# Altium PCB PCB.PcbDoc
Units mm, origin at the board's own origin, x right, y up, seen from the top; angles counter-clockwise.
Board outline 38.99 x 14.86 mm, 2 copper layers (Top Layer, Bottom Layer); 9 components, 8 nets, 21 pads, 0 vias.
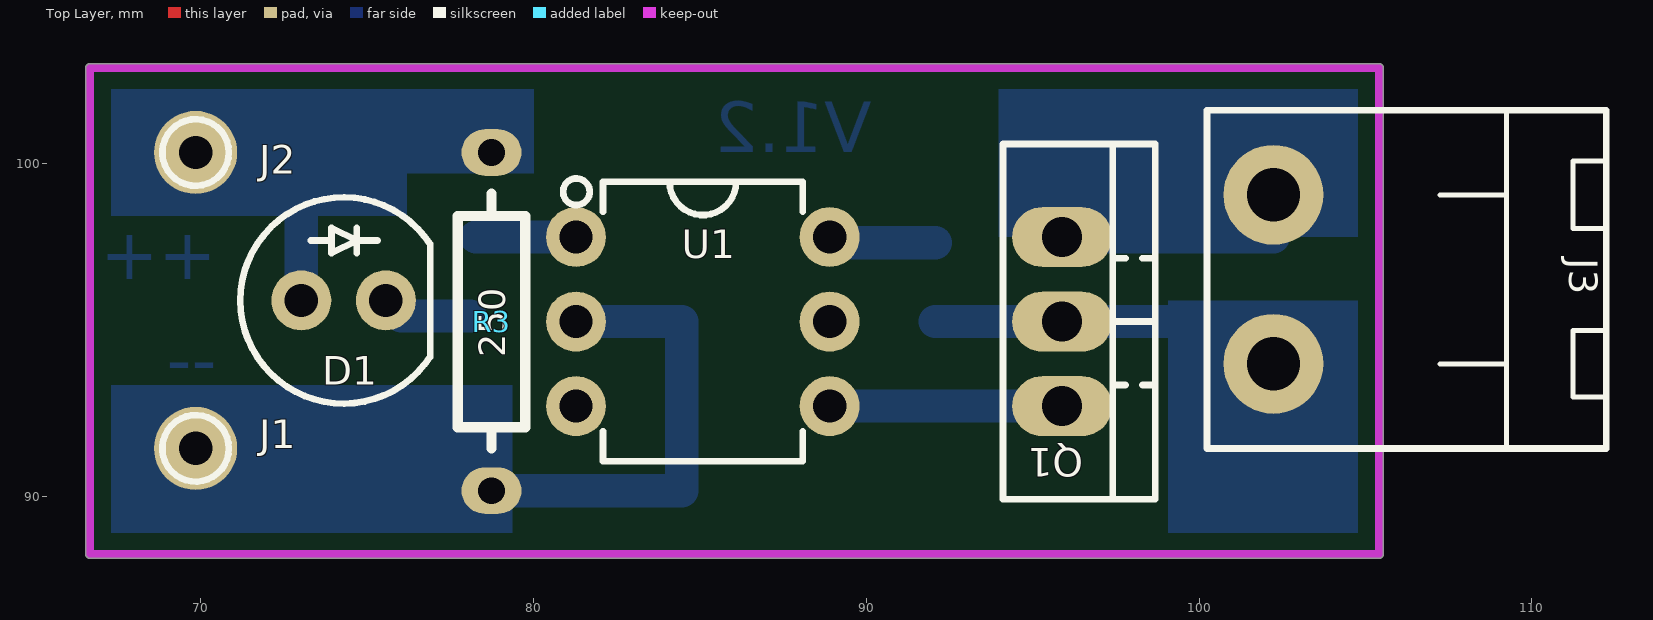
[diagram p0: Top Layer view]
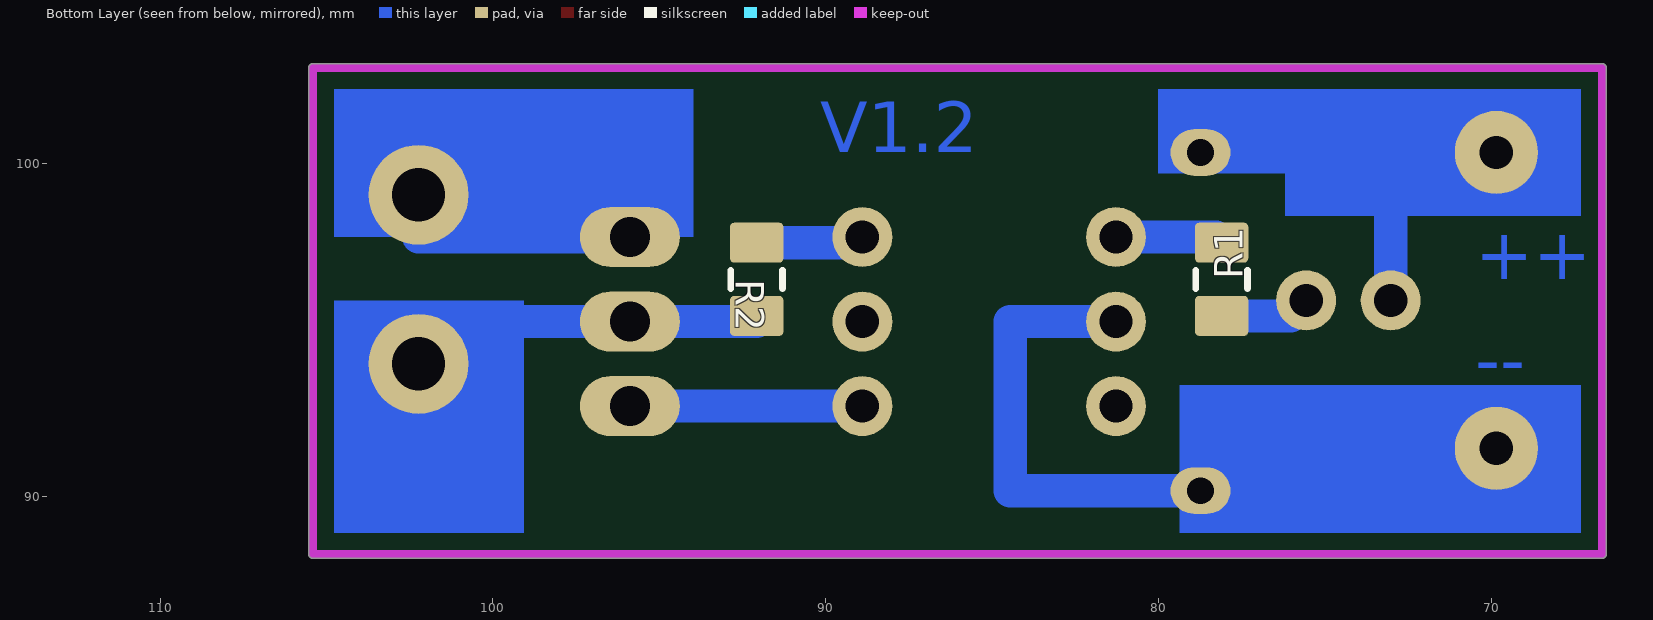
[diagram p1: Bottom Layer view, seen from below]
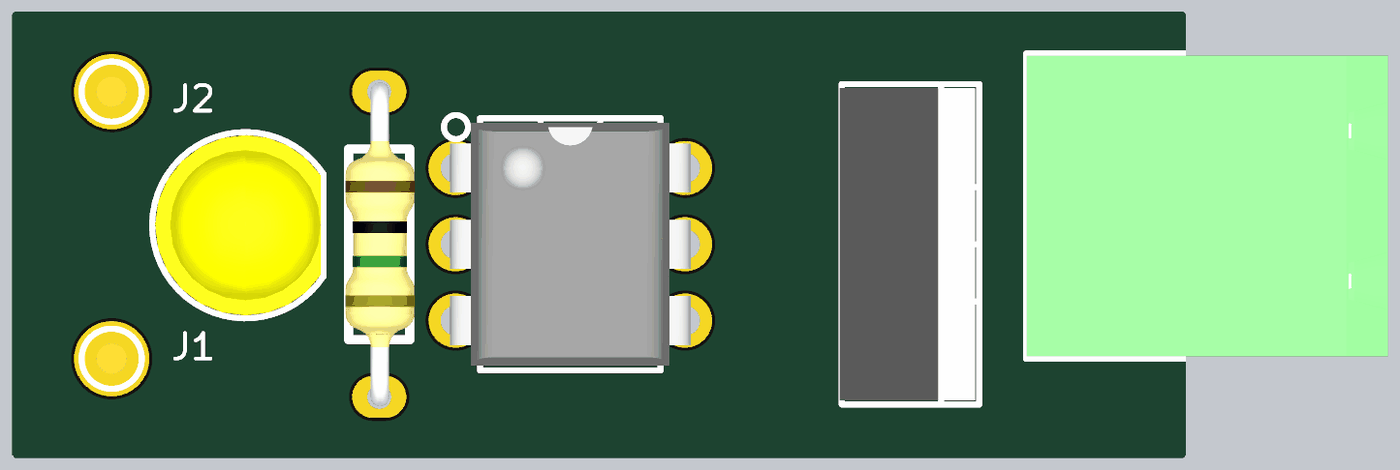
[diagram p2: 3D render of the assembled board from above, using the file's embedded part models]

## Layer stack, top to bottom
Top Solder: solder mask 0.0102, Solder Resist, Dk 3.5
Top Layer: signal copper 0.0356
Dielectric 1: dielectric 0.32, FR-4, Dk 4.8
Bottom Layer: signal copper 0.0356
Bottom Solder: solder mask 0.0102, Solder Resist, Dk 3.5

## Board outline
66.675,88.138 cw(c66.675,88.265) 66.548,88.265 66.548,102.87 cw(c66.675,102.87) 66.675,102.997 105.41,102.997 cw(c105.41,102.87) 105.537,102.87 105.537,88.265 cw(c105.41,88.265) 105.41,88.138

## Design rules (kind name [scope] priority, off if disabled: settings)
Clearance [All] p1: gap=0.254
Height [All] p1: minheight=0 maxheight=30 prefheight=12.7
PolygonConnect [All] p1: connectstyle=Relief reliefconductorwidth=0.254 reliefentries=4 polygonreliefangle="90 Angle" airgapwidth=0.254
RoutingCorners [All] p1: cornerstyle=90-Degree minsetback=2.54 maxsetback=2.54
RoutingVias [All] p1: holewidth=0.711 width=1.27 viastyle="Through Hole" minholewidth=0.711 minwidth=1.27 maxholewidth=1 maxwidth=1.27
SolderMaskExpansion [All] p1: expansion=0.102
Width [All] p1: maxlimit=0.3 minlimit=0.3 preferedwidth=0.3
28 further rules are at their usual default settings.

## Components (designator, comment, footprint, x,y, rotation, side; value= is the part's Value field where it differs from the comment)
D1 "YELLOW" LED_THD_5MM_YELLOW 74.295,95.885 r0 top
J1 "1PIN" TestPoint_THD_A 69.85,91.44 r90 top
J2 "1PIN" TestPoint_THD_A 69.85,100.33 r0 top
J3 "2PIN" Connector_Phoenix_2PIN_MSTB 102.235,96.52 r270 top (schematic designator J2)
Q1 "BT139" TO220_3PIN_V 95.885,95.25 r270 top
R1 "330" R_SMD_0805_EXPANDED 78.105,96.52 r90 bottom
R2 "330" R_SMD_0805_EXPANDED 92.075,96.52 r270 bottom
R3 "250" R_THD_AXIAL0.4(1/4W) 78.74,95.25 r270 top
U1 "MOC3021" DIP_6 85.09,95.25 r0 top

## Footprints (in the part's own frame and the unit in brackets; to place one, negate y for a bottom-side part, rotate by r counter-clockwise, add the part's x,y. Pads: shape width x height; smd on the part's side, far side on the other; paste and mask are expansions set on the pad)
Connector_Phoenix_2PIN_MSTB [mm] "Phoenix Contact, MSTB 5.08mm Pitch, 2 Way, Right Angle PCB Header"
  round 3 hole 1.6: 1(-2.54,0) 2(2.54,0)
  silkscreen extent -5.08,-2 5.08,10, body extent -5,-1.99 5,10.01, height 8.6
DIP_6 [mm] "DIP, pitch 2.54mm, 300mil Width"
  round 1.8 hole 1: 1(-3.81,2.54) 2(-3.81,0) 3(-3.81,-2.54) 4(3.81,-2.54) 5(3.81,0) 6(3.81,2.54)
  silkscreen extent -4.2,-4.2 3,4.3, body extent -4,-4.04 4,4.04, height 4.31
LED_THD_5MM_YELLOW [mm] "LED, THD, 5MM, YELLOW"
  round 1.8 hole 1: 1(-1.27,0) 2(1.27,0)
  silkscreen extent -3.1,-3.1 2.6,3.1, body extent -2.99,-3 2.5,3, height 9.14
R_SMD_0805_EXPANDED [mm] "Resistor, SMD, 0805-2012(2.0X1.3mm,1/8W)"
  rrect20% 1.2x1.6 smd mask+0.1: 1(-1.1,0) 2(1.1,0)
  Top Layer pour cut-out: -0.5,0.8 0.5,0.8 0.5,-0.8 -0.5,-0.8
  silkscreen extent -0.28,-0.77 0.28,0.77, body extent -1.15,-0.67 1.15,0.67, height 0.76
R_THD_AXIAL0.4(1/4W) [mm] "Resistor, Thru-Hole, AXIAL0.4(1/4Watt),"
  oval 1.4x1.8 hole 0.8: 1(-5.08,0) 2(5.08,0)
  silkscreen extent -3.84,-1.02 3.81,1.02, body extent -5.38,-1.13 5.38,1.18, height 3.51
TestPoint_THD_A [mm] "TEST POINT, SMALLEST SIZE"
  round 2.5 hole 1: 1(0,0)
  silkscreen extent -1,-1 1,1, body extent -0.5,-0.5 0.5,0.5, height 6.5
TO220_3PIN_V [mm] "TO-220 3 LEAD, TO-262, pitch: 2.54mm  10x4.5mm"
  oval 1.8x3 hole 1.2: 1(-2.54,0) 2(0,0) 3(2.54,0)
  silkscreen extent -5.33,-1.78 5.33,2.79, body extent -5.2,-1.85 5.2,2.65, height 19

## Part data
D1: library part LED_YELLOW, "LED, Yellow"
J1 J2: library part Connector_Socket_1Pin_Female, "Connector, Socket, 1Pin"
J3: library part Connector_Header_2Pin, "Connector, Header, 2Pin"
Q1: library part Triac, "Triac,"
R1 R2 R3: library part Resistor, "Resistor"
U1: "Opto-Triac"

## Nets (pads, with @x,y where several pads share a name; then routed paths per layer and width w, separated by ;. In a path a pad name is that pad's centre, name@x,y a point inside that pad or via, vN(x,y) a via of type N, cw(c..) or ccw(c..) an arc to the next point about the centre after c; other vN are vias at no path point)
GND: J1.1 R3.2 U1.2 | length 24.1
  Bottom Layer w1: J1.1 69.85,90.17 84.455,90.17 84.455,95.25 U1.2
NetD1_1: D1.1 J2.1 R3.1 | length 7
  Bottom Layer w1: J2.1@70.485,100.33 73.025,100.33 D1.1
NetD1_2: D1.2 R1.1 | length 2.1
  Bottom Layer w1: D1.2@76.03,95.42 R1.1
NetJ3_1: J3.1 Q1.1 | length 6.3
  Bottom Layer w1: Q1.1 J3.1@102.235,97.79
NetJ3_2: J3.2 Q1.2 R2.2 | length 12
  Bottom Layer w1: R2.2@92.075,95.25 Q1.2 99.695,95.25 99.695,93.98 100.965,93.98 J3.2@102.235,92.71
NetQ1_3: Q1.3 U1.4 | length 7
  Bottom Layer w1: U1.4 Q1.3
NetR1_2: R1.2 U1.1 | length 3
  Bottom Layer w1: R1.2@78.275,97.79 U1.1
NetR2_1: R2.1 U1.6 | length 3
  Bottom Layer w1: U1.6@89.07,97.62 R2.1
pads on no net: U1.3 U1.5

## Keep-outs
Keep-Out Layer:
  lines w0.254: 66.675,88.265 66.675,102.87 105.41,102.87 105.41,88.265 66.675,88.265

## Other copper
Bottom Layer:
  rectangle net NetD1_1: 76.2,99.695 80.01,102.235
  rectangle net NetD1_1: 67.31,98.425 76.2,102.235
  rectangle net GND: 67.31,88.9 79.375,93.345
  rectangle net NetJ3_2: 99.06,88.9 104.775,95.885
  rectangle net NetJ3_1: 93.98,97.79 104.775,102.235
  text "V1.2" at 90.17,100.33 h1.52
  text "++" at 70.485,96.52 h1.52
  text "--" at 70.485,93.345 h1.52